# Altium PCB 海关全向控制器主控板电路V2.PcbDoc (part 2 of 3)
Units mil, origin at the board's own origin, x right, y up, seen from the top; angles counter-clockwise.
Board outline 7874.02 x 2362.2 mil, 2 copper layers (Top Layer, Bottom Layer), stack 42.17 mil thick; 192 components, 121 nets, 551 pads, 141 vias.
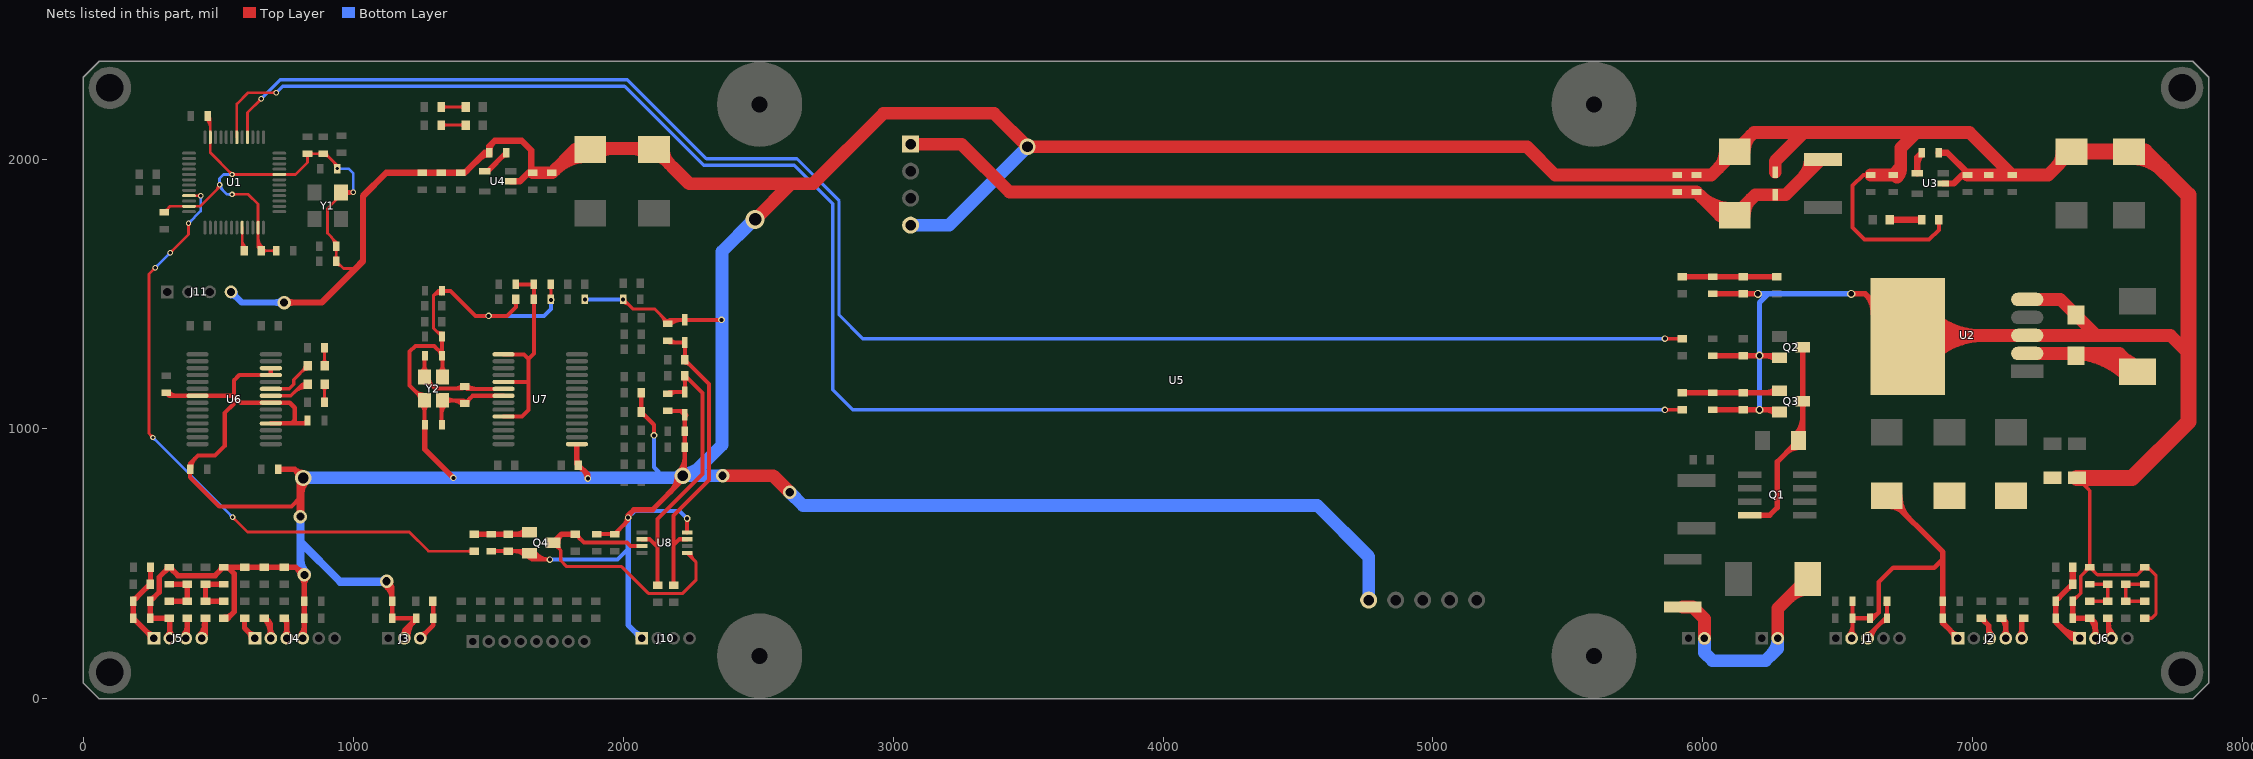
[diagram p2: the nets of this part, all layers, seen from the top]

## Via types
v1: diameter 20, hole 12, Top Layer to Bottom Layer, tented both sides, 71 vias
v2: diameter 25, hole 15, Top Layer to Bottom Layer, tented both sides, 34 vias
v3: diameter 50, hole 30, Top Layer to Bottom Layer, tented both sides, 18 vias
v4: diameter 30, hole 20, Top Layer to Bottom Layer, tented both sides, 10 vias
v5: diameter 70.87, hole 47.24, Top Layer to Bottom Layer, tented both sides, 5 vias
v6: diameter 60, hole 40, Top Layer to Bottom Layer, tented both sides, 3 vias

## Nets (pads, with @x,y where several pads share a name; then routed paths per layer and width w, separated by ;. In a path a pad name is that pad's centre, name@x,y a point inside that pad or via, vN(x,y) a via of type N, cw(c..) or ccw(c..) an arc to the next point about the centre after c; other vN are vias at no path point) (continued)
AD_POWKEY: R40.1 U1.16 | length 6217.1
  Top Layer w10: U1.16@608.27,2080.71 608.27,2172.24 v1(659.45,2223.43) ; v1@654.45,2223.43 cw(c642.38,2223.43) 650.91,2214.89 cw(c659.45,2206.35) v1@659.45,2218.43
  Top Layer w12: v2(5859.25,1334.65) R40.1@5923.23,1334.65 ; v2@5863.85,1330.05 cw(c5874.94,1318.95) 5874.94,1334.65 cw(c5874.94,1350.34) v2@5863.85,1339.24 ; R40.1@5913.79,1329.14 ccw(c5900.51,1315.86) 5900.51,1334.65 ccw(c5900.51,1353.43) R40.1@5913.79,1340.15
  Bottom Layer w12: v1@653.54,2218.5 729.02,2293.98 2015.45,2293.98 2308.53,2000.91 2644.19,2000.91 2800.12,1844.98 2800.12,1422.24 2887.72,1334.65 v2(5859.25,1334.65) ; v1@663.45,2223.43 cw(c675.48,2223.43) 666.97,2231.93 ; v2@5854.66,1330.05 ccw(c5843.56,1318.95) 5843.56,1334.65 ccw(c5843.56,1350.34) v2@5854.66,1339.24
AVDD: C53.2 C54.2 L4.2 U7.1 U7.5 U7.10 | length 831.4
  Top Layer w15: U7.10@1557.09,1046.26 1625,1046.26 1649.61,1070.87 1649.61,1259.84 ; U7.5@1557.09,1174.21 1646.65,1174.21 ; U7.1@1557.09,1276.57 1632.87,1276.57 1649.61,1259.84 ; L4.2@1602.36,1535.43 C53.2@1669.29,1535.43 1669.29,1279.53 1649.61,1259.84
BOOT0: R74.2 U1.44 | length 145.5
  Top Layer w10: 588.58,1680.43 ccw(c612.52,1680.43) R74.2@595.59,1663.51 ; 588.58,1704.58 ccw(c636.66,1704.58) R74.2@602.66,1670.58 ; U1.44@588.58,1746.06 588.58,1668.31 R74.2@596.46,1660.43
CTR_USB: R64.1 U1.33 | length 2650.9
  Top Layer w10: v1@252.87,968.5 ccw(c240.8,968.5) 249.34,977.04 ccw(c257.87,985.58) v1@257.87,973.5 ; v1(257.87,968.5) 243.11,983.27 243.11,1573.82 v1(266.73,1597.44) ; v1@261.73,1597.44 cw(c249.66,1597.44) 258.2,1588.91 cw(c266.73,1580.37) v1@266.73,1592.44 ; v1(321.85,1652.56) 389.76,1720.47 v1(389.76,1761.81) ; v1@321.85,1657.56 ccw(c321.85,1669.63) 330.39,1661.09 ccw(c338.92,1652.56) v1@326.85,1652.56 ; v1@386.23,1758.28 cw(c377.69,1749.74) 389.76,1749.74 cw(c401.83,1749.74) v1@393.3,1758.28 ; U1.33@391.73,1864.17 v1(435.04,1864.17) ; v1@431.5,1860.64 ccw(c422.97,1852.1) 422.97,1864.17 ccw(c422.97,1876.24) v1@431.5,1867.71 ; v1@553.15,668.23 cw(c553.15,656.16) 561.69,664.69 cw(c570.22,673.23) v1@558.15,673.23 ; v1(553.15,673.23) 608.27,618.11 1207.68,618.11 1278.56,547.23 R64.1@1448.82,547.23 ; R64.1@1438.67,541.02 ccw(c1423.69,526.04) 1423.69,547.23 ccw(c1423.69,568.43) R64.1@1438.67,553.44
  Bottom Layer w10: v1@257.87,963.5 cw(c257.87,951.43) 266.41,959.97 cw(c274.95,968.5) v1@262.87,968.5 ; v1(257.87,968.5) v1(553.15,673.23) ; v1(266.73,1597.44) v1(321.85,1652.56) ; v1@266.73,1602.44 ccw(c266.73,1614.51) 275.27,1605.98 ccw(c283.8,1597.44) v1@271.73,1597.44 ; v1@316.85,1652.56 cw(c304.78,1652.56) 313.31,1644.02 cw(c321.85,1635.49) v1@321.85,1647.56 ; v1(389.76,1761.81) 435.04,1807.09 v1(435.04,1864.17) ; v1@389.76,1766.81 ccw(c389.76,1778.88) 398.3,1770.35 ccw(c406.83,1761.81) v1@394.76,1761.81 ; v1@431.5,1860.64 cw(c422.97,1852.1) 435.04,1852.1 cw(c447.11,1852.1) v1@438.57,1860.64 ; v1@548.15,673.23 ccw(c536.08,673.23) 544.61,681.76 ccw(c553.15,690.3) v1@553.15,678.23
CTRPOW: R42.1 U1.18 | length 6503.1
  Top Layer w10: U1.18@568.9,2080.71 568.9,2203.74 611.22,2246.06 v1(714.57,2246.06) ; v1@711.03,2242.53 ccw(c702.5,2233.99) 702.5,2246.06 ccw(c702.5,2258.13) v1@711.03,2249.6
  Top Layer w12: v2(5859.25,1070.87) R42.1@5923.23,1070.87 ; v2@5863.85,1066.27 cw(c5874.94,1055.17) 5874.94,1070.87 cw(c5874.94,1086.56) v2@5863.85,1075.46 ; R42.1@5913.79,1065.37 ccw(c5900.51,1052.08) 5900.51,1070.87 ccw(c5900.51,1089.65) R42.1@5913.79,1076.37
  Bottom Layer w12: v1(714.57,2246.06) 738.49,2269.98 2005.51,2269.98 2298.59,1976.91 2634.25,1976.91 2776.12,1835.04 2776.12,1145.67 2850.92,1070.87 v2(5859.25,1070.87) ; v2@5854.66,1066.27 ccw(c5843.56,1055.17) 5843.56,1070.87 ccw(c5843.56,1086.56) v2@5854.66,1075.46
DIG_RX: J2.3 R4.1 | length 154.1
  Top Layer w20: R4.1@7031.5,299.21 7059.06,271.65 7059.06,228.35 J2.3@7062.99,224.41 ; R4.1@7039.21,299.21 ccw(c7057.84,299.21) R4.1@7044.67,286.04 ; J2.3@7053.36,234.04 ccw(c7039.61,247.79) 7059.06,247.79 ; 7059.06,266.8 ccw(c7105.38,266.8) J2.3@7072.62,234.04
DIG_SET: J2.5 R7.1 | length 147.4
  Top Layer w20: J2.5@7171.47,234.04 ccw(c7148.22,257.3) 7181.1,257.3 ccw(c7213.99,257.3) J2.5@7190.73,234.04 ; J2.5@7181.1,224.41 7181.1,291.34 R7.1@7188.98,299.21 ; 7181.1,280.58 cw(c7203.67,280.58) R7.1@7187.71,296.54
DIG_TX: J2.4 R5.1 | length 208.5
  Top Layer w20: R5.1@7106.3,299.21 7122.05,283.46 J2.4@7122.05,224.41 ; R5.1@7107.56,296.54 cw(c7072.6,261.57) 7122.05,261.57 ; R5.1@7109.37,295.53 cw(c7105.6,279.53) 7122.05,279.53 ; J2.4@7112.42,234.04 ccw(c7089.16,257.3) 7122.05,257.3 ccw(c7154.93,257.3) J2.4@7131.68,234.04 ; R5.1@7114.02,299.21 ccw(c7132.65,299.21) R5.1@7119.47,286.04
EN_USB: Q4.3 R63.2 U8.1 U8.7 | length 1245.4
  Top Layer w12: Q4.3@1740.16,578.73 1768.7,550.18 ; Q4.3@1748.03,565.04 cw(c1748.03,551.01) Q4.3@1757.95,560.93 ; Q4.3@1761.37,575.67 ccw(c1788.07,569.55) 1768.7,550.18 ; U8.1@2237.01,540.35 2269.68,507.68 2269.68,439.96 2220.47,390.75 2093.5,390.75 1994.09,490.16 1791.34,490.16 1768.7,512.8 1768.7,550.18 ; U8.1@2238.69,540.35 ccw(c2242.76,540.35) U8.1@2239.88,537.48 ; U8.1@2250.69,540.35 ccw(c2283.73,540.35) 2260.37,516.99
  Top Layer w15: R63.2@1822.83,610.22 1854.32,578.74 2014.76,578.74 2027.56,565.94 U8.7@2070.08,565.94 ; R63.2@1833.05,610.22 ccw(c1857.72,610.22) 1840.28,592.78
  Top Layer w20: Q4.3@1740.16,578.73 1771.65,610.22 R63.2@1822.83,610.22 ; Q4.3@1757.72,578.73 cw(c1800.11,578.73) 1770.13,608.7
GND: C1.2 C2.2 C3.2 C4.2 C5.2 C6.2 C7.2 C8.2 C9.2 C10.2 C11.1 C12.1 C13.2 C14.2 C15.1 C16.1 C17.2 C18.2 C19.1 C20.2 C21.2 C22.2 C23.2 C24.2 C25.1 C26.1 C27.2 C28.2 C29.2 C30.2 C31.2 C32.2 C33.2 C34.1 C35.1 C36.1 C37.2 C38.1 C39.2 C40.1 C41.1 C42.1 C43.2 C44.2 C45.1 C46.2 C47.2 C48.2 C49.1 C50.2 C51.1 C52.1 C53.1 C54.1 C55.1 C56.2 C57.1 C58.1 C59.2 C60.2 C61.2 C62.2 C63.2 C64.2 C65.2 C66.2 C67.2 C68.2 C69.1 C70.2 C71.1 C72.1 D3.2 D4.2 D6.1 D8.2 D11.1 D12.1 J1.2 J2.1 J3.2 J4.4 J5.2 J6.2 J8.2 J9.2 J10.1 J11.4 Q2.2 Q3.2 Q4.2 R13.1 R14.1 R15.1 R20.2 R21.1 R33.2 R34.1 R41.2 R43.2 R44.1 R47.1 R48.2 R53.1 R54.1 R62.2 R65.2 R74.1 U1.8 U1.23 U1.35 U1.47 U2.0 U2.3 U2.5 U3.2 U4.2 U5.4 U5.5 U6.7 U6.18 U6.21 U6.25 U6.26 U7.15 U8.4 Y1.2 Y2.2 Y2.4 | length 41027.7
  Top Layer w10: C22.2@299.21,1803.15 320.87,1824.8 ; C22.2@311.93,1803.16 cw(c342.44,1803.23) 320.87,1824.8 ; C21.2@455.81,2148.73 cw(c420.42,2113.34) 470.47,2113.34 ; C21.2@460.63,2159.45 470.47,2149.61 U1.23@470.47,2080.71 470.47,2023.62 v1(551.18,1942.91) U1.8@726.38,1942.91 786.42,1942.91 830.71,1987.2 C20.2@830.71,2019.69 C19.1@889.76,2019.69 896.65,2019.69 C24.2@940.94,1975.39 ; C21.2@462.88,2155.8 cw(c444.57,2137.48) 470.47,2137.48 ; 490.82,1882.55 ccw(c468.84,1904.53) v1@499.92,1904.53 ; v1(504.92,1904.53) 504.92,1896.65 433.07,1824.8 U1.35@391.73,1824.8 320.87,1824.8 ; v1@546.18,1942.91 ccw(c534.11,1942.91) 542.65,1951.45 ccw(c551.18,1959.98) v1@551.18,1947.91 ; v1(551.18,1869.09) 611.22,1869.09 647.64,1832.68 U1.47@647.64,1746.06 647.64,1672.24 R74.1@659.45,1660.43 C23.2@714.57,1660.43 ; v1@554.72,1865.56 cw(c563.25,1857.02) 563.25,1869.09 cw(c563.25,1881.17) v1@554.72,1872.63 ; v1@554.72,1939.38 cw(c563.25,1930.84) 563.25,1942.91 cw(c563.25,1954.98) v1@554.72,1946.45 ; 647.64,1689.94 ccw(c685.02,1689.94) R74.1@658.59,1663.51 ; 647.64,1714.08 ccw(c709.16,1714.08) R74.1@665.66,1670.58 ; R74.1@665.66,1654.23 cw(c680.64,1639.24) 680.64,1660.43 cw(c680.64,1681.63) R74.1@665.66,1666.64 ; C23.2@709.75,1655.62 ccw(c698.12,1643.99) 698.12,1660.43 ccw(c698.12,1676.88) C23.2@709.75,1665.25 ; C20.2@825.89,2014.87 cw(c814.27,2003.24) 830.71,2003.24 cw(c847.15,2003.24) C20.2@835.52,2014.87 ; C20.2@841.43,2014.87 cw(c853.06,2003.24) 853.06,2019.69 cw(c853.06,2036.13) C20.2@841.43,2024.5 ; C19.1@879.04,2014.87 ccw(c867.41,2003.24) 867.41,2019.69 ccw(c867.41,2036.13) C19.1@879.04,2024.5 ; C19.1@895.67,2012.87 cw(c895.67,1994.05) 908.98,2007.36 ; C19.1@902.48,2019.69 ccw(c916.55,2019.69) C19.1@906.6,2009.74 ; 918.42,1711.5 cw(c889.99,1683.07) C26.1@930.2,1683.07 ; 924.75,1991.59 cw(c897.74,1964.57) C24.2@935.94,1964.57 ; 925.84,1990.5 cw(c905.81,1970.47) C24.2@934.13,1970.47 ; 929.79,1986.7 ccw(c958.1,1994.28) C24.2@943.44,1968.9 ; C25.1@932.19,1632.77 ccw(c920.56,1644.4) 937.01,1644.4 ccw(c953.45,1644.4) C25.1@941.82,1632.77 ; C26.1@932.19,1666.44 cw(c920.56,1654.82) 937.01,1654.82 cw(c953.45,1654.82) C26.1@941.82,1666.44 ; C25.1@937.01,1609.33 cw(c937.01,1578.63) 958.72,1600.34 ; C24.2@937.7,1968.37 ccw(c931.72,1975.39) C24.2@940.94,1975.39 ; v1(940.94,1964.57) C24.2@940.94,1975.39 ; C24.2@944.19,1968.37 cw(c950.17,1975.39) C24.2@940.94,1975.39 ; Y1.2@970.47,1862.71 cw(c999.01,1838.65) v1@999.01,1875.98 ; Y1.2@970.47,1889.26 ccw(c999.01,1913.32) v1@999.01,1875.98 ; 985.22,1879.68 ccw(c989.41,1895.32) v1@997.5,1881.3 ; 985.55,1875.98 ccw(c985.55,1891.42) v1@996.46,1880.5 ; 986.9,1872.74 ccw(c983.16,1886.69) v1@995.67,1879.47 ; 990.14,1873.61 cw(c992.65,1864.24) v1@997.5,1872.64 ; v1(1000,1876.97) v1@999.02,1875.98 ; 1008.86,1594.49 964.57,1594.49 C25.1@937.01,1622.05 C26.1@937.01,1677.17 937.01,1692.91 904.53,1725.39 904.53,1816.51 954.72,1866.71 Y1.2@954.72,1875.98 v1@999.02,1875.98
  Top Layer w12: 1308.74,1362.52 ccw(c1328.74,1382.52) C64.2@1328.74,1354.24 ; 1310.41,1507.26 cw(c1324.11,1493.57) C63.2@1330.92,1511.7 ; C63.2@1324.58,1507.75 ccw(c1314.96,1498.38) 1314.96,1511.81 ; C63.2@1324.58,1515.87 cw(c1314.96,1525.24) 1314.96,1511.81 ; C63.2@1326.7,1500.47 ccw(c1316.91,1474.43) 1297.24,1494.1 ; C64.2@1328.74,1342.52 1297.24,1374.02 1297.24,1494.09 ; C63.2@1328.74,1511.81 1314.96,1511.81 ; C54.1@1727.69,1482.94 ccw(c1716.59,1494.04) 1732.28,1494.04 ccw(c1747.98,1494.04) C54.1@1736.88,1482.94 ; C54.1@1728.17,1490.33 ccw(c1718.25,1500.25) 1732.28,1500.25 ccw(c1746.31,1500.25) C54.1@1736.39,1490.33 ; C53.1@1728.17,1525.42 cw(c1718.25,1515.5) 1732.28,1515.5 cw(c1746.31,1515.5) C53.1@1736.39,1525.42 ; C54.1@1732.28,1480.32 C53.1@1732.28,1535.43 ; C60.2@1994.97,1478.09 ccw(c2014.3,1486.65) C60.2@2008.83,1466.23 ; C60.2@2000,1468.6 cw(c2000,1440.31) 2020,1460.31 ; C60.2@2000,1473.81 cw(c2000,1458.12) 2011.1,1469.22 cw(c2022.19,1480.31) C60.2@2006.5,1480.31 ; v2(2000,1480.31) 2035.43,1444.88 2116.14,1444.88 2165.35,1395.67 C61.2@2165.35,1389.76 ; 2141.18,1419.85 cw(c2111.09,1389.76) C61.2@2153.64,1389.76 ; C15.1@7370.08,362.2 7399.61,391.73 7399.61,454.72 C17.2@7433.07,488.19 ; C15.1@7370.08,373.92 ccw(c7370.08,402.21) 7390.08,382.21 ; C31.2@7385.83,818.9 7433.07,771.65 C17.2@7433.07,488.19 ; C31.2@7395.67,801.28 cw(c7395.67,782.49) C31.2@7408.95,795.77 ; C31.2@7401.29,818.9 ccw(c7438.63,818.9) 7412.23,792.5 ; 7413.07,468.19 ccw(c7393.07,488.19) C17.2@7421.35,488.19 ; C31.2@7413.29,818.9 ccw(c7479.6,818.9) 7432.71,772.01 ; C17.2@7428.96,492.3 ccw(c7419.04,502.22) 7433.07,502.22 ccw(c7447.1,502.22) C17.2@7437.18,492.3 ; C17.2@7444.79,488.19 ccw(c7473.07,488.19) 7453.07,468.19 ; 7617.79,468.19 ccw(c7597.79,488.19) C18.2@7626.08,488.19 ; R34.1@7637.8,299.21 7662.4,299.21 7679.13,315.94 7679.13,456.69 7647.64,488.19 C18.2@7637.8,488.19 7609.25,459.65 7461.61,459.65 C17.2@7433.07,488.19 ; C18.2@7643.7,482.38 cw(c7643.7,458.84) 7660.34,475.49 ; R34.1@7647.23,293.71 cw(c7660.51,280.43) 7660.51,299.21 cw(c7660.51,317.99) R34.1@7647.23,304.71 ; 1297.24,1494.09 1314.96,1511.81
  Top Layer w15: 1229.54,1140.54 ccw(c1263.78,1174.79) Y2.4@1263.78,1126.36 ; 1239.04,1131.04 cw(c1218.24,1110.24) Y2.4@1247.66,1110.24 ; Y2.4@1252.38,1090.96 cw(c1224.86,1063.44) 1263.78,1063.44 cw(c1302.7,1063.44) Y2.4@1275.18,1090.96 ; C67.2@1263.78,1015.75 Y2.4@1263.78,1106.3 1208.66,1161.42 1208.66,1286.42 1230.31,1308.07 1300.2,1308.07 C66.2@1328.74,1279.53 ; 1263.78,1036.81 ccw(c1280.91,1036.81) C67.2@1268.8,1024.7 ; Y2.2@1319.31,1208.25 ccw(c1291.79,1235.77) 1330.71,1235.77 ccw(c1369.63,1235.77) Y2.2@1342.11,1208.25 ; C66.2@1319.99,1288.28 cw(c1309.27,1277.56) C66.2@1324.43,1277.56 ; C66.2@1325.69,1262.7 cw(c1313.58,1250.59) 1330.71,1250.59 ; C66.2@1328.74,1271.65 C66.2@1328.74,1279.53 ; C64.2@1328.74,1342.52 C66.2@1328.74,1279.53 ; C63.2@1328.74,1511.81 1360.24,1511.81 1452.76,1419.29 v2(1501.97,1419.29) 1569.88,1419.29 1602.36,1451.77 R48.2@1602.36,1480.32 ; Y2.2@1330.71,1192.91 C66.2@1330.71,1271.65 ; C72.1@1511.81,547.23 R65.2@1574.8,547.23 1645.67,547.23 Q4.2@1653.54,539.36 1677.15,515.75 ; R65.2@1566.43,542.79 ccw(c1555.71,532.07) 1555.71,547.23 ccw(c1555.71,562.39) R65.2@1566.43,551.67 ; R65.2@1583.18,542.79 cw(c1593.9,532.07) 1593.9,547.23 cw(c1593.9,562.39) R65.2@1583.18,551.67 ; 1597.24,547.23 cw(c1597.24,490.93) Q4.2@1637.05,530.74 ; R48.2@1597.92,1471.94 cw(c1587.2,1461.22) 1602.36,1461.22 cw(c1617.52,1461.22) R48.2@1606.8,1471.94 ; Q4.2@1646.6,529.47 ccw(c1672.25,546.59) 1672.25,515.75 ; Q4.2@1659.08,537.79 ccw(c1700.3,565.31) 1700.3,515.75 ; Q4.2@1671.55,546.12 ccw(c1728.34,584.03) v2(1728.35,515.75) 1677.15,515.75 ; Q4.2@1672.86,535.17 ccw(c1690.22,528.82) 1677.15,515.75 ; v2(1732.28,1478.35) C54.1@1732.28,1480.32 ; C70.2@1901.57,610.22 C71.1@1968.5,610.22 2018.7,660.42 v2(2018.7,671.26) ; C71.1@1978.72,610.22 cw(c2003.39,610.22) 1985.94,627.66 ; 2002.5,644.22 ccw(c1975.46,671.26) v2@2013.7,671.26 ; C61.2@2163.7,1397.32 cw(c2180.62,1380.4) 2180.62,1404.33 ; C61.2@2165.35,1389.76 2179.92,1404.33 ; C61.2@2174.31,1386.72 cw(c2216.84,1344.19) 2216.84,1404.33 ; C61.2@2175.51,1390.49 cw(c2191.11,1393.14) 2179.92,1404.33 ; U8.4@2237.01,617.13 2237.01,668.11 v2(2237.2,668.31) ; 2237.01,655.76 cw(c2249.75,655.76) v2@2240.74,664.77 ; v2(2363.98,1404.33) D11.1@2228.35,1404.33 2179.92,1404.33 ; C40.1@6622.05,1940.94 6594.49,1940.94 6555.12,1901.57 6555.12,1746.06 6599.41,1701.77 6838.58,1701.77 6874.02,1737.2 R44.1@6874.02,1775.59 ; R44.1@6869.58,1767.21 cw(c6858.86,1756.49) 6874.02,1756.49 cw(c6889.18,1756.49) R44.1@6878.46,1767.21
  Top Layer w16: C58.1@307.09,1133.86 317.91,1123.03 U6.7@423.23,1123.03 558.07,1123.03 ; C58.1@315.69,1136.55 ccw(c348.33,1169.2) 348.33,1123.03 ; C56.2@399.48,856.3 cw(c446.7,856.3) 413.31,889.69 ; U6.18@694.88,1020.67 771.65,1020.67 ; U6.26@694.88,1225.39 U6.25@694.88,1199.8 577.76,1199.8 558.07,1180.12 558.07,1123.03 ; 804.13,745.08 771.65,712.6 503.94,712.6 395.67,820.87 C56.2@395.67,850.39 395.67,872.05 425.2,901.57 488.19,901.57 523.62,937.01 523.62,1059.06 558.07,1093.5 558.07,1123.03 ; 809.63,1020.67 ccw(c809.63,1046.67) C65.2@828.01,1028.29 ; C65.2@830.71,1031.5 819.88,1020.67 771.65,1020.67 ; v3@1113.63,422.57 cw(c1064.82,359.37) C1.2@1144.67,359.37 ; v3@1123.4,435.23 cw(c1089.98,391.94) 1144.67,391.94 ; v3(1124.02,436.02) 1144.67,415.37 ; v3@1128.53,419.63 cw(c1132.94,403.64) 1144.67,415.37 ; v3@1140.41,431.51 ccw(c1156.4,427.1) 1144.67,415.37 ; J3.2@1179.85,237.09 ccw(c1167.02,254.9) 1188.98,254.9 ; J3.2@1188.6,224.39 cw(c1253.83,227.41) 1207.66,273.59 ; J3.2@1188.98,224.41 1188.98,254.91 ; J3.2@1198.1,237.09 cw(c1210.93,254.9) 1188.98,254.9 ; J3.2@1204.58,225.13 cw(c1302.82,229.67) C8.2@1233.28,299.21 ; 1216.7,282.63 cw(c1233.28,266.04) C8.2@1233.28,289.5 ; 1222.56,280.64 cw(c1239.26,271) C8.2@1234.27,289.63 ; R54.1@2062.84,1071.02 ccw(c2052.98,1080.88) 2066.93,1080.88 ccw(c2080.88,1080.88) R54.1@2071.02,1071.02 ; R53.1@2062.84,1125.83 cw(c2052.98,1115.97) 2066.93,1115.97 cw(c2080.88,1115.97) R53.1@2071.02,1125.83 ; R54.1@2066.93,1053.28 cw(c2066.93,1029.82) 2083.52,1046.41 ; R53.1@2066.93,1133.86 R54.1@2066.93,1062.99 2114.17,1015.75 v2(2114.17,976.38) ; C62.2@2165.35,1066.93 2213.78,1066.93 ; v6@2204.92,842.33 ccw(c2148.35,898.89) 2228.35,898.89 ; 2211.54,1066.93 cw(c2211.54,1045.79) D12.1@2226.49,1060.74 ; v6@2216.23,831.01 ccw(c2186.98,860.27) 2228.35,860.27 ; v6(2220.47,826.77) 2228.35,834.65 C69.1@2228.35,933.07 C68.2@2228.35,992.13 D12.1@2228.35,1052.36 2213.78,1066.93 ; D12.1@2226.3,1060.95 ccw(c2213.78,1050.84) 2213.78,1066.93 ; D12.1@2227.12,1064.92 cw(c2221.81,1074.96) 2213.78,1066.93 ; 2228.35,860.87 ccw(c2254.58,860.87) v6@2236.03,842.33 ; D12.1@2229.1,1051.61 ccw(c2232.41,1054.92) D12.1@2234.6,1050.78 ; J1.2@6540.13,235.46 ccw(c6506.38,269.21) 6554.12,269.21 ; J1.2@6551.18,224.41 6554.12,227.35 C7.2@6554.12,299.21 ; 6554.12,255.03 ccw(c6581.81,255.03) J1.2@6562.23,235.46 ; C6.2@6554.12,362.2 C7.2@6554.12,299.21 ; C3.2@6617.6,293.02 ccw(c6619.22,305.96) C3.2@6628.43,296.74 ; C3.2@6619.58,308.9 ccw(c6624.35,347.11) 6651.57,319.88 ; 6888.76,517.72 6857.27,486.22 6704.72,486.22 6651.57,433.07 6651.57,319.88 ; 558.07,1123.03 583.66,1097.44 U6.21@694.88,1097.44 764.76,1097.44 783.46,1078.74 783.46,1032.48 771.65,1020.67 ; 1144.67,415.37 C1.2@1144.67,362.2 C2.2@1144.67,299.21 C8.2@1233.28,299.21 ; 1188.98,254.91 C8.2@1233.28,299.21 ; C7.2@6554.12,299.21 C3.2@6619.11,299.21 6630.91,299.21 6651.57,319.88
  Top Layer w20: C11.1@248.03,369.92 ccw(c248.03,388.55) 261.2,375.38 ; 305.72,475.02 ccw(c292.55,488.19) C13.2@311.18,488.19 ; J5.2@311.23,234.04 ccw(c287.98,257.3) 320.87,257.3 ccw(c353.75,257.3) J5.2@330.5,234.04 ; R20.2@316.23,296.54 cw(c305.02,285.34) 320.87,285.34 ; J5.2@320.87,224.41 320.87,297.24 R20.2@318.9,299.21 C12.1@248.03,299.21 C11.1@248.03,362.2 281.5,395.67 281.5,450.79 C13.2@318.9,488.19 350.39,456.69 488.19,456.69 C14.2@519.68,488.19 C14.2@535.43,488.19 ; C13.2@326.61,488.19 ccw(c345.24,488.19) 332.07,475.02 ; 506.51,475.02 ccw(c493.34,488.19) C14.2@511.97,488.19 ; R21.1@519.68,299.21 536.42,299.21 559.06,321.85 559.06,464.57 C14.2@535.43,488.19 ; R21.1@523.62,302.99 ccw(c523.62,343.01) 551.92,314.71 ; C14.2@525.59,486.38 cw(c525.59,458.24) 545.48,478.14 ; C57.1@722.44,850.39 783.46,850.39 ; v6@795,820.07 ccw(c755.47,822.39) 783.47,850.39 ; 796.77,476.85 cw(c779.57,459.65) v3@803.9,459.65 ; J4.4@803.36,234.04 ccw(c765.85,271.55) 818.9,271.55 ; v3@808.29,449.04 cw(c782.68,423.43) 818.9,423.43 cw(c855.11,423.43) v3@829.5,449.04 ; J4.4@812.99,224.41 818.9,230.31 C10.2@818.9,299.21 C9.2@818.9,362.2 v3@818.9,454.72 ; v6@813.79,838.86 cw(c811.46,878.39) 783.47,850.39 ; v6(814.96,818.9) 783.46,850.39 ; v3@816.44,457.19 785.43,488.19 ; v3@818.71,474.64 cw(c818.14,520.89) 785.43,488.19 ; C67.2@1265.75,1015.75 1265.75,924.21 v2(1371.06,818.9) ; 1828.74,891.08 ccw(c1854.67,891.08) R62.2@1836.33,872.75 ; 1828.74,936.02 1828.74,871.06 R62.2@1833.66,866.14 1869.09,830.71 v2(1869.09,816.93) ; R62.2@1833.66,858.43 cw(c1833.66,839.8) R62.2@1846.83,852.97 ; 1855.08,844.72 cw(c1827.29,816.93) v2@1866.59,816.93 ; v2(2018.7,671.26) 2018.7,680.12 2039.37,700.79 2109.25,700.79 2220.47,812.01 v6(2220.47,826.77) ; v2@2021.2,671.26 cw(c2048.62,671.26) 2029.23,690.65 ; 2175.89,767.43 ccw(c2116.54,826.77) v6@2200.47,826.77 ; C36.1@6036.42,1070.87 v4(6209.65,1070.87) 6275.59,1070.87 Q3.2@6283.46,1062.99 ; C35.1@6036.42,1271.65 R41.2@6149.61,1271.65 v4(6209.65,1271.65) 6275.59,1271.65 Q2.2@6283.46,1263.78 ; C42.1@6036.42,1500.32 R47.1@6149.61,1500.32 v4(6204.06,1500.32) ; 6233.2,1070.87 cw(c6233.2,1020.6) Q3.2@6268.74,1056.14 ; 6233.2,1271.65 cw(c6233.2,1221.39) Q2.2@6268.74,1256.93 ; v4(6549.88,1500.32) 6601.68,1500.32 ; U2.0@6631.15,1425.9 ccw(c6530.45,1429.07) 6601.69,1500.31 ; C27.2@6681.07,751.96 6888.76,544.27 6888.76,517.72 C4.2@6888.76,362.2 C5.2@6888.76,299.21 6888.76,280.53 J2.1@6944.88,224.41 ; C27.2@6690.92,712.75 cw(c6690.92,641.84) 6741.05,691.98 ; C27.2@6710.13,751.96 ccw(c6780.27,751.96) 6730.67,702.36 ; C27.2@6730.13,751.96 ccw(c6848.56,751.96) 6764.82,668.22 ; U2.0@6758.88,1343.12 6601.68,1500.32 ; C5.2@6890.57,293.31 ccw(c6925.8,293.31) 6900.89,268.4 ; J2.1@6931.26,224.41 ccw(c6898.37,224.41) 6921.63,247.66 ccw(c6944.88,270.92) J2.1@6944.88,238.03 ; C15.1@7370.08,362.2 C16.1@7370.08,299.21 R33.2@7433.07,299.21 7454.72,277.56 J6.2@7454.72,224.41 ; R33.2@7434.34,296.54 cw(c7385.11,247.32) J6.2@7454.72,247.32 ; R33.2@7436.03,295.56 cw(c7429.55,271.24) 7454.72,271.24 ; R33.2@7440.79,299.21 ccw(c7459.42,299.21) R33.2@7446.24,286.04 ; J6.2@7445.09,234.04 ccw(c7421.84,257.3) 7454.72,257.3 ccw(c7487.61,257.3) J6.2@7464.36,234.04 ; C14.2@535.43,488.19 R15.1@597.42,488.19 R14.1@670.76,488.19 R13.1@744.09,488.19 785.43,488.19
  Top Layer w23.62: v3(744.09,1468.5) 882.87,1468.5 1008.86,1594.49 1036.42,1622.05 1036.42,1863.19 1122.05,1948.82 C52.1@1255.91,1948.82 C51.1@1326.77,1948.82 C50.2@1397.64,1948.82 1413.2,1948.82 1488,2023.62 C55.1@1503.94,2023.62 1503.94,2047.24 1524.61,2067.91 1624.02,2067.91 1659.45,2032.48 1659.45,1954.72 C49.1@1665.35,1948.82 1649.61,1948.82 1618.11,1917.32 U4.2@1583.66,1917.32 ; v3@753.42,1459.18 cw(c775.94,1436.66) 775.94,1468.5 cw(c775.94,1500.34) v3@753.42,1477.83 ; C50.2@1403.54,1948.82 ccw(c1403.54,1972.12) 1420.02,1955.64 ; 1466.65,2002.27 cw(c1503.94,1964.98) C55.1@1503.94,2017.72 ; C55.1@1503.94,2029.53 cw(c1546.71,2029.53) 1516.46,2059.77 ; 1642.65,1941.86 cw(c1659.45,1925.06) C49.1@1659.45,1948.82 ; C41.1@6874.02,2023.62 6905.51,2023.62 6980.31,1948.82 C38.1@6980.31,1940.94 6960.63,1940.94 6929.13,1909.45 U3.2@6890.75,1909.45 ; 6950.89,1931.2 cw(c6974.41,1907.68) 6974.41,1940.94 ccw(c6941.14,1940.94) 6964.67,1964.47
  Top Layer w30: v3(804.13,675.2) 804.13,745.08 804.13,808.07 v6(814.96,818.9) ; 804.13,756.55 cw(c877.31,756.55) v6@825.57,808.29
  Top Layer w47.24: C49.1@1665.35,1948.82 C48.2@1736.22,1948.82 1822.83,2035.43 C46.2@1877.95,2035.43 1881.89,2039.37 2114.17,2039.37 2245.08,1908.46 2621.06,1908.46 ; C48.2@1747.13,1959.73 cw(c1868.11,1838.76) C46.2@1868.11,2009.84 ; C46.2@1905.89,2017.34 cw(c1959.08,1964.15) 1959.08,2039.37 ; C46.2@1905.89,2053.53 ccw(c1940.07,2087.71) 1940.07,2039.37 ; 2033.05,2039.37 cw(c2033.05,1964.15) C47.2@2086.24,2017.34 ; 2052.05,2039.37 ccw(c2052.05,2087.71) C47.2@2086.24,2053.53 ; C47.2@2124.02,2009.84 cw(c2124.02,1962.32) C47.2@2157.62,1995.92 ; C47.2@2149.61,2035.43 ccw(c2225.64,2035.43) 2171.88,1981.67 ; v3(2368.11,826.77) 2556.1,826.77 v3(2617.13,765.75) ; v5(2489.17,1776.57) 2621.06,1908.46 ; D4.2@5925.2,340.55 5962.6,340.55 6005.91,297.24 J9.2@6005.91,224.41 ; 6057.62,1967.07 ccw(c5997.13,2027.56) C43.2@6082.68,2027.56 ; C43.2@6153.54,2027.56 cw(c6239.09,2027.56) 6178.6,2088.05 ; D8.2@6267.72,1951.57 6267.72,1992.13 6374.02,2098.43 ; J8.2@6277.56,224.41 6277.56,334.65 D3.2@6387.8,444.88 ; 6320.59,377.67 cw(c6387.8,310.46) D3.2@6387.8,405.51 ; C40.1@6622.05,1940.94 C39.2@6704.72,1940.94 6733.27,1969.49 6733.27,2041.34 6790.35,2098.43 ; U2.0@6758.88,1343.12 6762.21,1346.46 U2.3@7201.75,1346.46 7457.68,1346.46 ; U2.0@6806.2,1295.8 cw(c6928.51,1173.5) 6928.51,1346.46 ; U2.0@6806.2,1390.45 ccw(c6912.41,1496.66) 6912.41,1346.46 ; U2.0@6839.61,1262.39 cw(c7042.56,1059.44) 7042.56,1346.46 ; U2.0@6839.61,1423.86 ccw(c7026.47,1610.72) 7026.47,1346.46 ; C38.1@6980.31,1940.94 C34.1@7145.67,1940.94 ; U2.5@7201.75,1479.79 7324.34,1479.79 D6.1@7381.89,1422.24 7457.68,1346.46 ; 7305.65,1967.07 ccw(c7245.17,2027.56) C33.2@7330.71,2027.56 ; C33.2@7366.14,2027.56 7279.53,1940.94 C34.1@7145.67,1940.94 ; 7799.21,1279.53 7732.28,1346.46 7457.68,1346.46 ; 2621.06,1908.46 2703.74,1908.46 2964.57,2169.29 3374.02,2169.29 v6(3498.03,2045.28) 5348.43,2045.28 5452.76,1940.94 C44.2@5905.51,1940.94 C45.1@5976.38,1940.94 6031.5,1940.94 6188.98,2098.43 6374.02,2098.43 ; 6374.02,2098.43 6790.35,2098.43 ; 6790.35,2098.43 6988.19,2098.43 C34.1@7145.67,1940.94 ; C39.2@6718.98,1932.59 ccw(c6684.49,1967.08) 6733.27,1967.08 cw(c6684.49,1967.08) C39.2@6718.98,1932.59
  Top Layer w59.06: C33.2@7366.14,2027.56 C32.2@7578.74,2027.56 7637.8,2027.56 7799.21,1866.14 7799.21,1279.53 7799.21,1027.56 7590.55,818.9 C31.2@7385.83,818.9 ; C32.2@7588.58,2007.87 cw(c7588.58,1841.54) 7706.2,1959.16
  Bottom Layer w10: v1@501.39,1908.06 ccw(c492.85,1916.6) 504.92,1916.6 ccw(c516.99,1916.6) v1@508.46,1908.06 ; v1@509.92,1904.53 ccw(c541,1904.53) 519.02,1882.55 ; v1@547.65,1865.56 ccw(c539.11,1857.02) 539.11,1869.09 ccw(c539.11,1881.17) v1@547.65,1872.63 ; v1@547.65,1939.38 ccw(c539.11,1930.84) 539.11,1942.91 ccw(c539.11,1954.98) v1@547.65,1946.45 ; v1(551.18,1869.09) 532.48,1869.09 504.92,1896.65 v1(504.92,1904.53) 504.92,1928.15 519.68,1942.91 v1(551.18,1942.91) ; v1(940.94,1964.57) 983.27,1964.57 1000,1947.83 v1(1000,1876.97) ; v1@944.48,1961.03 cw(c953.02,1952.5) 953.02,1964.57 cw(c953.02,1976.64) v1@944.48,1968.1 ; v1@996.46,1880.5 ccw(c987.93,1889.04) 1000,1889.04 ccw(c1012.07,1889.04) v1@1003.54,1880.5
  Bottom Layer w15: v2(1501.97,1419.29) 1706.69,1419.29 1732.28,1444.88 v2(1732.28,1478.35) ; v2(1728.35,515.75) 1979.33,515.75 2018.7,555.12 ; v2(1858.27,1480.32) v2(2000,1480.31) ; v2(2018.7,671.26) 2044.29,696.85 2208.66,696.85 v2(2237.2,668.31)
  Bottom Layer w16: v2(2114.17,976.38) 2114.17,858.27 2153.54,818.9
  Bottom Layer w20: v2(2018.7,671.26) 2018.7,555.12 2018.7,274.61 J10.1@2068.9,224.41 ; J10.1@2055.28,224.41 ccw(c2022.39,224.41) 2045.64,247.66 ccw(c2068.9,270.92) J10.1@2068.9,238.03 ; v4(6204.06,1500.32) 6242.13,1500.32 ; v4(6209.65,1070.87) v4(6209.65,1271.65) 6209.65,1467.84 6242.13,1500.32 ; v4(6549.88,1500.32) 6242.13,1500.32
  Bottom Layer w23.62: J11.4@547.24,1496.06 cw(c547.24,1467.55) 567.41,1487.71 cw(c587.57,1507.87) J11.4@559.06,1507.87 ; J11.4@547.24,1507.87 586.61,1468.5 v3(744.09,1468.5) ; v3@734.77,1459.18 ccw(c712.25,1436.66) 712.25,1468.5 ccw(c712.25,1500.34) v3@734.77,1477.83
  Bottom Layer w30: 804.13,519.43 ccw(c878.68,519.43) v3@825.97,466.72 ; v3(804.13,675.2) 804.13,581.69 ; v3(818.9,459.65) 804.13,474.41 804.13,581.69 ; 1095.12,434.06 ccw(c1095.12,464.92) v3@1116.94,443.09 ; v3(1124.02,436.02) 1125.98,434.06 951.77,434.06 804.13,581.69
  Bottom Layer w47.24: v6@811.02,818.9 v6(814.96,818.9) v2(1371.06,818.9) 2153.54,818.9 v6@2220.47,818.9 ; 2186.06,818.9 ccw(c2186.06,861.18) v6@2215.96,831.28 ; v6(2220.47,826.77) 2251.97,826.77 ; v6@2220.47,833.15 ccw(c2220.47,924.59) 2285.13,859.93 ; v3(2368.11,826.77) 2251.97,826.77 ; v5@2480.32,1771.65 2366.14,1657.48 2366.14,940.94 2251.97,826.77 ; v3(2617.13,765.75) 2666.34,716.54 4571.85,716.54 4761.96,526.43 U5.5@4761.96,366.12 ; U5.4@3064.96,1755.12 3207.87,1755.12 v6(3498.03,2045.28) ; J9.2@6005.91,224.41 6005.91,171.26 6035.43,141.73 6232.28,141.73 6277.56,187.01 J8.2@6277.56,224.41 cw(c6187.26,224.41) 6251.11,160.56
HOST_N: C61.1 D11.2 R66.2 R72.1 U8.3 | length 1193.3
  Top Layer w15: C61.1@2172.05,1320.08 D11.2@2228.35,1320.08 R72.1@2228.35,1255.91 ; C61.1@2174.31,1329.82 ccw(c2197.83,1353.34) 2197.83,1320.08 ; R66.2@2182.57,425.7 ccw(c2171.85,436.42) 2187.01,436.42 ccw(c2202.17,436.42) R66.2@2191.45,425.7 ; R66.2@2187.01,421.26 2187.01,569.89 ; R72.1@2223.91,1264.28 ccw(c2213.19,1275) 2228.35,1275 ccw(c2243.51,1275) R72.1@2232.79,1264.28 ; R72.1@2228.35,1245.69 cw(c2228.35,1221.02) 2245.79,1238.46 ; R72.1@2232.28,1251.97 2318.35,1165.91 2318.35,810.47 2187.01,679.13 2187.01,569.89 ; U8.3@2237.01,591.54 2208.66,591.54 2187.01,569.89
HOST_P: C62.1 D12.2 R67.2 R73.1 U8.6 | length 1165.2
  Top Layer w15: U8.6@2070.08,591.54 2098.42,591.54 2127.95,562 ; R67.2@2123.51,425.7 ccw(c2112.79,436.42) 2127.95,436.42 ccw(c2143.11,436.42) R67.2@2132.39,425.7 ; R67.2@2127.95,421.26 2127.95,562 ; C62.1@2165.35,1129.92 2172.05,1136.61 D12.2@2228.35,1136.61 R73.1@2228.35,1196.85 2230.35,1196.85 2293.35,1133.86 2293.35,832.72 2127.95,667.32 2127.95,562 ; C62.1@2174.31,1126.87 cw(c2197.83,1103.36) 2197.83,1136.61 ; R73.1@2223.91,1188.47 cw(c2213.19,1177.75) 2228.35,1177.75 cw(c2243.51,1177.75) R73.1@2232.79,1188.47 ; R73.1@2228.35,1186.63 cw(c2228.35,1157.12) 2249.21,1177.99
HUBXTAL1: C66.1 R50.2 U7.6 Y2.3 | length 605.3
  Top Layer w15: Y2.3@1252.38,1208.25 ccw(c1224.86,1235.77) 1263.78,1235.77 ccw(c1302.7,1235.77) Y2.3@1275.18,1208.25 ; Y2.3@1263.78,1172.85 cw(c1263.78,1133.93) 1291.3,1161.45 cw(c1318.82,1188.98) Y2.3@1279.9,1188.98 ; 1263.78,1250.59 cw(c1280.91,1250.59) C66.1@1268.8,1262.7 ; C66.1@1267.72,1271.65 1263.78,1267.72 Y2.3@1263.78,1192.91 1263.78,1188.98 1303.15,1149.61 1405.51,1149.61 R50.2@1413.39,1157.48 1422.24,1148.62 U7.6@1557.09,1148.62 ; 1375.28,1149.61 ccw(c1375.28,1191.65) R50.2@1405.01,1161.92 ; R50.2@1421.76,1161.92 ccw(c1453.87,1194.03) 1453.87,1148.62
HUBXTAL2: C67.1 R50.1 U7.7 Y2.1 | length 549.1
  Top Layer w15: Y2.1@1319.31,1090.96 cw(c1301.29,1072.95) 1326.77,1072.95 ; C67.1@1326.77,1015.75 1326.77,1102.36 Y2.1@1330.71,1106.3 1401.57,1106.3 R50.1@1413.39,1094.49 1441.93,1123.03 U7.7@1557.09,1123.03 ; 1326.77,1036.81 ccw(c1343.9,1036.81) C67.1@1331.79,1024.7 ; 1326.77,1053.94 cw(c1379.14,1053.94) Y2.1@1342.11,1090.96 ; Y2.1@1342.11,1094.9 cw(c1369.63,1067.38) 1369.63,1106.3 cw(c1369.63,1145.22) Y2.1@1342.11,1117.7 ; 1365.77,1106.3 cw(c1365.77,1050.81) R50.1@1405.01,1090.05 ; R50.1@1401.99,1106.3 cw(c1401.99,1087.03) R50.1@1415.62,1100.65 ; R50.1@1423.6,1094.49 cw(c1448.27,1094.49) 1430.83,1111.93
NetC3_1: C3.1 J1.3 R1.2 | length 276.5
  Top Layer w16: J1.3@6610.24,224.41 6610.24,232.28 6682.1,304.15 R1.2@6682.1,362.2 ; J1.3@6610.24,240.03 ccw(c6610.24,258.74) 6623.46,245.51 ; J1.3@6625.86,224.41 cw(c6682.58,224.41) 6642.47,264.52 ; 6657.09,279.13 cw(c6682.1,254.12) C3.1@6682.1,289.5 ; R1.2@6678.02,354.18 cw(c6668.15,344.31) 6682.1,344.31 cw(c6696.06,344.31) R1.2@6686.19,354.18
NetC8_1: C8.1 J3.3 R6.2 | length 230.1
  Top Layer w16: J3.3@1248.03,224.41 1296.28,272.65 C8.1@1296.28,299.21 1296.28,356.3 R6.2@1294.31,358.27 ; J3.3@1248.03,240.03 ccw(c1248.03,277.75) 1274.7,251.08 ccw(c1301.37,224.41) J3.3@1263.65,224.41 ; R6.2@1290.22,354.18 cw(c1275.6,339.56) 1296.28,339.56
NetC11_2: C11.2 C12.2 J5.1 R11.2 R12.2 | length 418.8
  Top Layer w20: C12.2@185.04,291.5 cw(c185.04,272.87) 198.21,286.04 ; C11.2@185.04,369.92 ccw(c185.04,388.55) 198.21,375.38 ; R11.2@234.86,412.02 cw(c248.03,398.85) R11.2@248.03,417.48 ; 235.2,249.06 ccw(c261.81,275.67) J5.1@261.81,238.03 ; J5.1@239.95,244.3 cw(c220.06,224.41) J5.1@248.19,224.41 ; R12.2@249,488.19 249,426.17 R11.2@248.03,425.2 C11.2@185.04,362.2 C12.2@185.04,299.21 259.84,224.41 J5.1@261.81,224.41
NetC13_1: C13.1 R16.1 R17.1 R20.1 | length 196.9
  Top Layer w20: R20.1@318.9,362.2 R17.1@385.83,362.2 R16.1@385.83,425.2 C13.1@318.9,425.2
NetC14_1: C14.1 R18.1 R19.1 R21.2 | length 196.9
  Top Layer w20: R21.2@519.68,362.2 R19.1@452.76,362.2 R18.1@452.76,425.2 C14.1@519.68,425.2
NetC15_2: C15.2 C16.2 J6.1 R22.2 R23.2 | length 547.3
  Top Layer w20: C15.2@7307.09,369.92 ccw(c7307.09,388.55) 7320.26,375.38 ; C16.2@7308.9,293.31 ccw(c7332.28,293.31) 7315.75,276.77 ; 7325.37,267.15 ccw(c7395.67,337.45) J6.1@7395.67,238.03 ; R22.2@7356.91,412.02 cw(c7370.08,398.85) R22.2@7370.08,417.48 ; 7359.51,233.01 ccw(c7395.67,269.17) J6.1@7395.67,218.03 ; R22.2@7370.08,425.2 C15.2@7307.09,362.2 C16.2@7307.09,299.21 7307.09,285.43 7368.11,224.41 ; J6.1@7384.85,216.14 ccw(c7368.11,203.35) 7368.11,224.41 ; J6.1@7384.85,232.68 cw(c7368.11,245.47) 7368.11,224.41 ; J6.1@7395.67,224.41 7368.11,224.41
  Top Layer w25: R22.2@7370.08,425.2 R23.2@7370.08,488.19
NetC17_1: C17.1 R26.1 R27.1 R33.1 | length 366.4
  Top Layer w12: R33.1@7433.07,362.2 R27.1@7500,362.2 R26.1@7500,425.2 C17.1@7433.07,425.2 ; R33.1@7442.51,356.7 cw(c7455.79,343.42) 7455.79,362.2 cw(c7455.79,380.99) R33.1@7442.51,367.71 ; C17.1@7443.09,421.09 cw(c7453.01,411.17) 7453.01,425.2 cw(c7453.01,439.23) C17.1@7443.09,429.31 ; R27.1@7490.56,356.7 ccw(c7477.28,343.42) 7477.28,362.2 ccw(c7477.28,380.99) R27.1@7490.56,367.71 ; R26.1@7490.56,419.7 ccw(c7477.28,406.42) 7477.28,425.2 ccw(c7477.28,443.98) R26.1@7490.56,430.7 ; R27.1@7494.5,367.71 ccw(c7481.22,380.99) 7500,380.99 ccw(c7518.78,380.99) R27.1@7505.5,367.71 ; R26.1@7494.5,419.7 cw(c7481.22,406.42) 7500,406.42 cw(c7518.78,406.42) R26.1@7505.5,419.7
NetC18_1: C18.1 R29.1 R30.1 R34.2 | length 374.3
  Top Layer w12: R30.1@7561.43,367.71 ccw(c7548.15,380.99) 7566.93,380.99 ccw(c7585.71,380.99) R30.1@7572.43,367.71 ; R29.1@7561.43,419.7 cw(c7548.15,406.42) 7566.93,406.42 cw(c7585.71,406.42) R29.1@7572.43,419.7 ; R30.1@7576.37,356.7 cw(c7589.65,343.42) 7589.65,362.2 cw(c7589.65,380.99) R30.1@7576.37,367.71 ; R29.1@7576.37,419.7 cw(c7589.65,406.42) 7589.65,425.2 cw(c7589.65,443.98) R29.1@7576.37,430.7 ; C18.1@7627.78,421.09 ccw(c7617.86,411.17) 7617.86,425.2 ccw(c7617.86,439.23) C18.1@7627.78,429.31 ; R34.2@7628.36,356.7 ccw(c7615.08,343.42) 7615.08,362.2 ccw(c7615.08,380.99) R34.2@7628.36,367.71 ; R34.2@7637.8,362.2 R30.1@7566.93,362.2 R29.1@7566.93,425.2 C18.1@7637.8,425.2
NetC36_2: C36.2 Q3.1 R42.2 R43.1 | length 403
  Top Layer w20: R42.2@5923.23,1133.86 C36.2@6036.42,1133.86 6275.59,1133.86 Q3.1@6283.46,1141.73 ; 6233.2,1133.86 ccw(c6233.2,1184.12) Q3.1@6268.74,1148.58
NetC41_2: C41.2 U3.4 | length 156.8
  Top Layer w23.62: U3.4@6794.29,1946.85 6794.29,2006.89 C41.2@6811.02,2023.62 ; 6794.29,1977.32 cw(c6851.42,1977.32) 6811.02,2017.72 ccw(c6814.53,1997.79) 6794.29,1997.79
NetC42_2: C42.2 R45.2 R46.2 R47.2 | length 350.4
  Top Layer w20: R46.2@5923.23,1563.31 C42.2@6036.42,1563.31 R47.2@6149.61,1563.31 R45.2@6273.62,1563.31
NetC43_1: C43.1 C44.1 C45.2 D8.1 F2.2 U5.1 | length 3851
  Top Layer w47.24: U5.1@3064.96,2055.12 3253.94,2055.12 3431.1,1877.95 C44.1@5905.51,1877.95 C45.2@5976.38,1877.95 6062.99,1791.34 C43.1@6118.11,1791.34 6194.09,1867.32 D8.1@6267.72,1867.32 6306.3,1867.32 6437.01,1998.03 F2.2@6444.88,1998.03 ; C45.2@5987.29,1867.04 ccw(c6108.27,1988.02) C43.1@6108.27,1816.93 ; C43.1@6153.54,1791.34 cw(c6239.09,1791.34) 6178.6,1851.83 ; 6369.8,1930.82 ccw(c6302.59,1998.03) F2.2@6397.64,1998.03
NetC55_2: C55.2 U4.4 | length 122.9
  Top Layer w20: U4.4@1487.2,1954.72 1498.03,1954.72 C55.2@1566.93,2023.62 ; 1553.76,2010.45 cw(c1566.93,1997.28) C55.2@1566.93,2015.91
NetC72_2: C72.2 Q4.1 R64.2 R65.1 | length 247.5
  Top Layer w20: R64.2@1448.82,610.22 C72.2@1511.81,610.22 R65.1@1574.8,610.22 1645.67,610.22 Q4.1@1653.54,618.1 ; 1603.28,610.22 ccw(c1603.28,660.49) Q4.1@1638.82,624.95
NetD1_2: D1.2 R76.2 | length 164.6
  Top Layer w10: R76.2@1326.77,2125.98 D1.2@1417.32,2125.98 ; R76.2@1332.98,2119.78 cw(c1347.97,2104.79) 1347.97,2125.98 cw(c1347.97,2147.18) R76.2@1332.98,2132.19 ; 1391.37,2125.98 cw(c1391.37,2100.04) D1.2@1409.72,2118.38 ; 1391.38,2125.98 ccw(c1391.38,2151.93) D1.2@1409.72,2133.58
NetD2_2: D2.2 R77.2 | length 164.6
  Top Layer w10: R77.2@1326.77,2192.91 D2.2@1417.32,2192.91 ; R77.2@1332.98,2186.71 cw(c1347.97,2171.72) 1347.97,2192.91 cw(c1347.97,2214.11) R77.2@1332.98,2199.12 ; D2.2@1409.72,2185.31 ccw(c1391.37,2166.97) 1391.37,2192.91 ccw(c1391.37,2218.86) D2.2@1409.72,2200.51
NetD5_1: D5.1 Q1.4 Q2.3 Q3.3 | length 1037.4
  Top Layer w20: Q1.4@6173.23,680.91 6247.83,680.91 6275.59,708.66 6275.59,877.95 D5.1@6354.33,956.69 6370.08,972.44 Q3.3@6370.08,1102.36 Q2.3@6370.08,1303.15 ; 6310.91,913.28 cw(c6354.33,869.86) D5.1@6354.33,931.26 ; D5.1@6329.92,932.29 ccw(c6313.39,948.82) D5.1@6336.77,948.82 ; D5.1@6341.91,976.98 ccw(c6273.92,1044.98) 6370.08,1044.98 ; D5.1@6356.06,962.84 ccw(c6322.2,996.69) 6370.08,996.69 ; Q3.3@6363.23,1095.51 cw(c6346.7,1078.98) 6370.08,1078.98 cw(c6393.46,1078.98) Q3.3@6376.93,1095.51 ; Q3.3@6363.23,1109.21 ccw(c6346.7,1125.74) 6370.08,1125.74 ccw(c6393.46,1125.74) Q3.3@6376.93,1109.21 ; Q2.3@6363.23,1296.3 cw(c6346.7,1279.77) 6370.08,1279.77 cw(c6393.46,1279.77) Q2.3@6376.93,1296.3
NetD6_2: D6.2 L3.1 U2.2 | length 937.3
  Top Layer w47.24: U2.2@7201.75,1279.79 7543.04,1279.79 ; 7347.99,1279.79 cw(c7347.99,1239.72) D6.2@7376.32,1268.05 ; D6.2@7366.55,1279.79 cw(c7366.55,988.6) L3.1@7572.46,1194.5 ; D6.2@7387.46,1268.05 cw(c7415.79,1239.72) 7415.79,1279.79 ; 7480.61,1279.79 cw(c7480.61,1102.66) L3.1@7605.86,1227.91 ; L3.1@7565.15,1215.69 ccw(c7488.32,1225.06) 7543.05,1279.79 ; L3.1@7610.24,1212.6 7543.04,1279.79
NetD7_2: D7.2 R44.2 | length 118.1
  Top Layer w23.62: D7.2@6692.91,1775.59 R44.2@6811.02,1775.59
NetD15_1: D15.1 R55.2 | length 133.9
  Top Layer w12: D15.1@886.81,1242.57 ccw(c870.17,1259.21) 893.7,1259.21 ccw(c917.23,1259.21) D15.1@900.59,1242.57 ; R55.2@888.2,1291.68 cw(c874.92,1278.4) 893.7,1278.4 cw(c912.48,1278.4) R55.2@899.2,1291.68 ; D15.1@893.7,1233.71 R55.2@893.7,1301.12
NetD15_2: D15.2 U6.23 | length 218.1
  Top Layer w12: U6.23@694.88,1148.62 762.8,1148.62 779.53,1165.35 779.53,1182.53 D15.2@830.71,1233.71 ; 810.71,1213.71 cw(c830.71,1193.71) D15.2@830.71,1222 ; D15.2@815.46,1218.46 ccw(c802.18,1231.74) D15.2@820.96,1231.74
NetD16_1: D16.1 R57.2 | length 133.9
  Top Layer w12: D16.1@886.81,1157.45 cw(c870.17,1140.8) 893.7,1140.8 cw(c917.23,1140.8) D16.1@900.59,1157.45 ; R57.2@888.2,1108.34 ccw(c874.92,1121.62) 893.7,1121.62 ccw(c912.48,1121.62) R57.2@899.2,1108.34 ; R57.2@893.7,1098.9 D16.1@893.7,1166.31
NetD16_2: D16.2 U6.22 | length 271.7
  Top Layer w12: U6.22@694.88,1123.03 768.7,1123.03 811.98,1166.31 ; 778.73,1133.06 cw(c830.71,1081.08) D16.2@830.71,1154.59 ; 799.21,1153.55 cw(c830.71,1122.05) D16.2@830.71,1166.59 ; D16.2@822.72,1160.71 ccw(c811.98,1153.18) 811.98,1166.31 ; D16.2@822.72,1171.9 cw(c811.98,1179.43) 811.98,1166.31 ; D16.2@830.71,1166.31 811.98,1166.31
NetJ4_1: J4.1 R8.1 | length 142.4
  Top Layer w20: R8.1@597.42,299.21 597.42,262.81 J4.1@635.83,224.41 ; J4.1@622.2,224.41 ccw(c589.32,224.41) 612.57,247.66 ccw(c635.83,270.92) J4.1@635.83,238.03
NetJ4_2: J4.2 R9.1 | length 241
  Top Layer w20: R9.1@670.76,299.21 692.91,277.06 692.91,226.38 J4.2@694.88,224.41 ; R9.1@672.02,296.54 cw(c621.59,246.11) J4.2@692.91,246.11 ; R9.1@673.72,295.56 cw(c667,270.53) 692.91,270.53 ; R9.1@678.48,299.21 ccw(c697.11,299.21) R9.1@683.93,286.04 ; J4.2@685.25,234.04 ccw(c666.75,252.54) 692.91,252.54 ; 692.91,262.05 ccw(c732.52,262.05) J4.2@704.51,234.04
NetJ4_3: J4.3 R10.1 | length 153.5
  Top Layer w20: R10.1@744.09,299.21 753.94,289.37 J4.3@753.94,224.41 ; J4.3@744.3,234.04 ccw(c721.05,257.3) 753.94,257.3 ccw(c786.82,257.3) J4.3@763.57,234.04 ; R10.1@745.36,296.54 cw(c724.65,275.83) 753.94,275.83
NetJ5_3: J5.3 R17.2 | length 118.9
  Top Layer w20: J5.3@370.29,234.04 ccw(c332.78,271.55) 385.83,271.55 ; J5.3@379.92,224.41 385.83,230.31 R17.2@385.83,299.21
NetJ5_4: J5.4 R19.2 | length 166.7
  Top Layer w20: J5.4@429.34,234.04 ccw(c372.82,290.56) R19.2@452.76,290.56 ; J5.4@438.98,224.41 452.76,238.19 R19.2@452.76,299.21 ; R19.2@445.55,297.32 cw(c419.78,282.45) 448.52,274.75
NetJ6_3: J6.3 R27.2 | length 251.3
  Top Layer w12: R27.2@7494.5,293.71 cw(c7481.22,280.43) 7500,280.43 cw(c7518.78,280.43) R27.2@7505.5,293.71 ; 7500,270.62 ccw(c7559.12,270.62) J6.3@7517.72,228.42 ; 7507.5,271.22 cw(c7538.19,279.44) R27.2@7510.67,295.32 ; J6.3@7513.78,224.41 7500,238.19 R27.2@7500,299.21 ccw(c7587.17,299.21) J6.3@7526.12,236.99